# EAGLE board ACE (EAGLE 9.6.2)
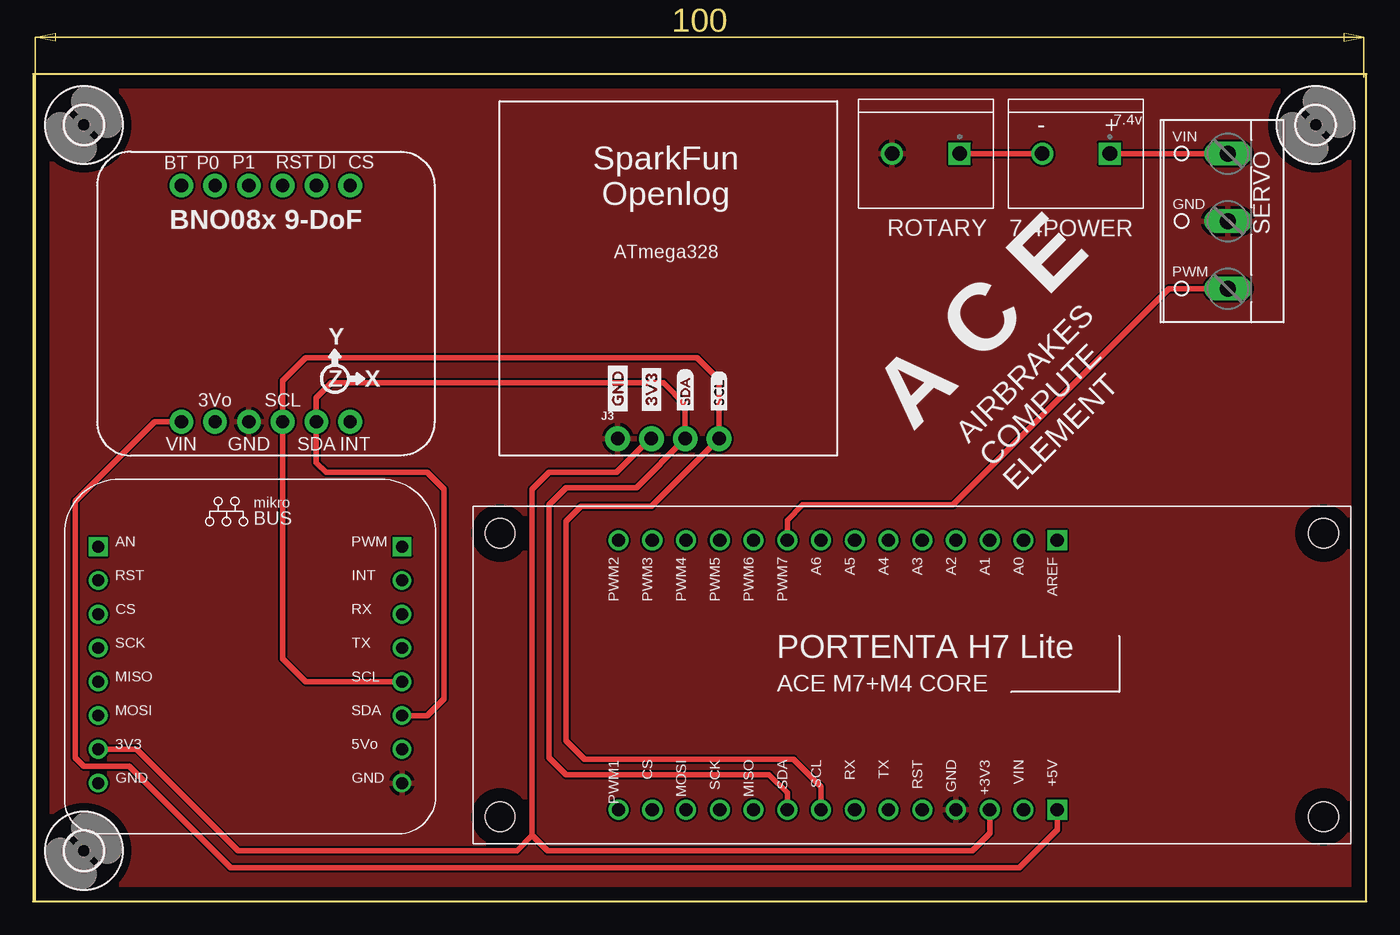
[diagram p0: board, top side]
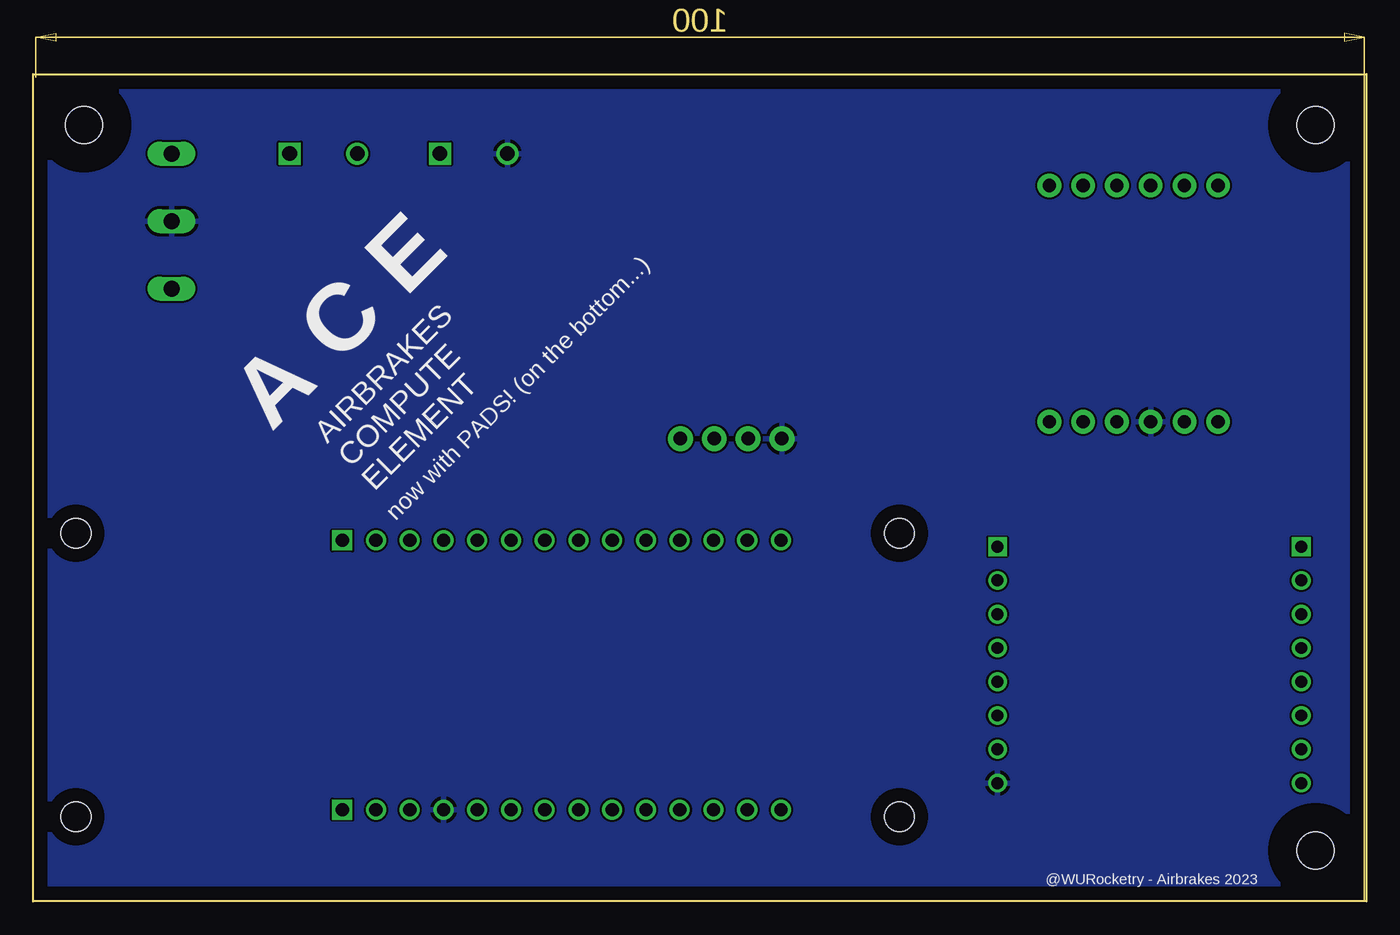
[diagram p1: board, bottom side, seen from below]

Size 100.33 x 62.23 mm. Coordinates in mm from the lower left corner, seen from the top.
Outline: 0,62.23 0,0 100.33,0 100.33,62.23 0,62.23
Copper layers (1*16): Top 0.035mm / dielectric 1.5mm / Bottom 0.035mm
Design rules "default *": minimum track width 6mil, minimum drill 0.35mm, track to track 6mil, track to pad 6mil, pad to pad 6mil, via to via 6mil, smd to smd 6mil, copper to edge 40mil, drill to drill 8mil, minimum pad ring 10mil, minimum via ring 8mil, stop-mask expansion 4mil, vias tented up to drill 0mil, thermal gap 10mil
Net classes: 1 vcc: width 0.152 mm; 2 lowpower: width 0.254 mm, drill 0.381 mm

## Footprints (pad centres in the part's own frame; a part is rotated, then mirrored left to right if it is on the bottom)
TE_282837-2 = drill 1.1 square: 1 -2.54,0 | drill 1.1: 2 2.54,0
1X04_NO_SILK = drill 1.016 pad 1.88: 1 0,0; 2 2.54,0; 3 5.08,0; 4 7.62,0
W237-3E = drill 1.194 long: 1 -5.08,-0.635; 2 0,-0.635; 3 5.08,-0.635
MIKROE-ALTITUDE-6-CLICK-PINOUT = drill 0.9: 3V3 2.54,7.62; 5V 25.4,7.62; CS 2.54,17.78; GND_0 2.54,5.08; GND_1 25.4,5.08; INT 25.4,20.32; MISO 2.54,12.7; MOSI 2.54,10.16; RST 2.54,20.32; RX 25.4,17.78; SCK 2.54,15.24; SCL 25.4,12.7; SDA 25.4,10.16; TX 25.4,15.24 | drill 0.9 square: AN 2.54,22.86; PWM 25.4,22.86
ADAFRUIT_BNO08X_FOOTPRINT = drill 1 pad 1.778: 3VO 10.16,3.81; BT 7.62,21.59; CS 20.32,21.59; DI 17.78,21.59; GND 12.7,3.81; INT 20.32,3.81; P0 10.16,21.59; P1 12.7,21.59; RST 15.24,21.59; SCL 15.24,3.81; SDA 17.78,3.81; VIN 7.62,3.81
MODULE_ABX00042_HEADERS = drill 1 square: J1 -10.135,10.947; J15 10.135,10.947 | drill 1: J2 -10.135,8.407; J3 -10.135,5.867; J4 -10.135,3.327; J5 -10.135,0.787; J6 -10.135,-1.753; J7 -10.135,-4.293; J8 -10.135,-6.833; J9 -10.135,-9.373; J10 -10.135,-11.913; J11 -10.135,-14.453; J12 -10.135,-16.993; J13 -10.135,-19.533; J14 -10.135,-22.073; J16 10.135,8.407; J17 10.135,5.867; J18 10.135,3.327; J19 10.135,0.787; J20 10.135,-1.753; J21 10.135,-4.293; J22 10.135,-6.833; J23 10.135,-9.373; J24 10.135,-11.913; J25 10.135,-14.453; J26 10.135,-16.993; J27 10.135,-19.533; J28 10.135,-22.073 | hole 2.25: -10.67,30.99; 10.67,30.99; 10.67,-30.99; -10.67,-30.99
2,8 = hole 2.8: 0,0

## Placement (x,y rotation side)
7.4POWER  282837-2  [TE_282837-2]  78.49,56.26 180 top
J3  PTH  [1X04_NO_SILK]  43.99,34.81 0 top
ROTARY_TERMINAL  282837-2  [TE_282837-2]  67.18,56.26 180 top
SERVO  [W237-3E]  89.28,51.18 90 top
U$1  MIKROE-ALTITUDE-6-CLICK-DVC  [MIKROE-ALTITUDE-6-CLICK-PINOUT]  2.35,3.82 0 top
U$5  ADAFRUIT_BNO08X  [ADAFRUIT_BNO08X_FOOTPRINT]  3.53,32.27 0 top
U$8  [3V3-03]  46.53,36.46 90 top
U$9  [GND-03]  43.99,36.46 90 top
U$10  ABX00042_HEADERS_IO  [MODULE_ABX00042_HEADERS]  66.12,17.03 270 top
U$13  [2,8]  3.81,58.42 0 top
U$14  [2,8]  96.52,58.42 0 top
U$15  [2,8]  3.81,3.81 0 top
U$16  [SDA1]  49.07,36.59 90 top
U$19  [SCL2]  51.61,36.59 90 top

## Library data of the parts
7.4POWER ROTARY_TERMINAL = 282837-2; AVAILABILITY: In Stock; CHECK_PRICES: https://www.snapeda.com/parts/282837-2/TE+Connectivity+AMP+Connectors/view-part/?ref=eda; COMMENT: 282837-2; DESCRIPTION: Terminal Block Connector Wire Receptacle 2 5.08 mm 30-16 AWG Green 13.5 A 250 V | TE Connectivity 282837-2; MF: TE Connectivity; MP: 282837-2; PACKAGE: None; PRICE: None; PURCHASE-URL: https://www.snapeda.com/api/url_track_click_mouser/?unipart_id=2549980&manufacturer=TE Connectivity&part_name=282837-2&search_term=None; SNAPEDA_LINK: https://www.snapeda.com/parts/282837-2/TE+Connectivity+AMP+Connectors/view-part/?ref=snap
J3 = SparkX
SERVO = con-wago-508; OC_FARNELL: unknown; OC_NEWARK: unknown
U$1 = MIKROE-4903
U$5 = ADAFRUIT_BNO08x
U$8 U$9 = Labels
U$10 = ABX00042
U$13-U$15 = holes
U$16 U$19 = buzzard_labels (13)

## Nets
3.3V [lowpower]: J3.2 U$1.3V3 U$10.J17
GND [lowpower]: J3.1 ROTARY_TERMINAL.2 SERVO.2 U$1.GND_1 U$5.GND U$10.J18
N$4 [lowpower]: U$1.GND_0
SCL: J3.4 U$1.SCL U$5.SCL U$10.J22
SDA: J3.3 U$1.SDA U$5.SDA U$10.J23
SERVO_GND: 7.4POWER.2 ROTARY_TERMINAL.1
SERVO_PWM: SERVO.1 U$10.J9
SERVO_VIN: 7.4POWER.1 SERVO.3
VCC [lowpower]: U$5.VIN U$10.J15

## Tracks (layer width: path | path; a pad name or v marks a point on that pad's centre or on a via)
3.3V
  Top 0.406: U$10.J17 71.99,5.12 70.7,3.82 38.69,3.82 37.55,4.97 | J3.2 46.44,34.81 43.9,32.27 38.82,32.27 37.55,31 37.55,4.97 | 37.55,4.97 36.41,3.82 15.42,3.82 7.8,11.44 U$1.3V3
GND
  pour Bottom: 0,62.23 100.33,62.23 100.33,0 0,0
  pour Top: 100.33,62.23 0,62.23 0,0 100.33,0
SCL
  Top 0.406: U$10.J22 59.29,8.62 57.23,10.68 41.49,10.68 40.09,12.08 40.09,28.59 41.23,29.73 46.53,29.73 J3.4 51.61,39.26 49.96,40.91 20.52,40.91 18.77,39.16 U$5.SCL 18.77,18.25 20.5,16.52 U$1.SCL
SDA
  Top 0.406: U$10.J23 56.75,8.17 55.38,9.54 40.09,9.54 38.82,10.81 38.82,29.86 40.09,31.13 45.39,31.13 J3.3 49.07,37.35 47.42,39 22.42,39 21.31,37.89 U$5.SDA 21.31,33 22.04,32.27 29.64,32.27 30.91,31 30.91,15.25 29.64,13.98 U$1.SDA
SERVO_GND
  Top 0.406: 7.4POWER.2 ROTARY_TERMINAL.1
SERVO_PWM
  Top 0.406: U$10.J9 56.75,28.68 57.91,29.84 69.22,29.84 85.47,46.1 SERVO.1
SERVO_VIN
  Top 0.406: 7.4POWER.1 SERVO.3
VCC
  Top 0.406: U$10.J15 77.07,5.37 74.24,2.54 14.86,2.54 7.24,10.16 3.81,10.16 3.18,10.8 3.18,30.1 9.16,36.08 U$5.VIN

## Text on the board
tPlace: - | + | 7.4v | VIN | SparkFun / Openlog | GND | ROTARY | ATmega328 | PWM | A C E | AIRBRAKES / COMPUTE / ELEMENT
bPlace: A C E | AIRBRAKES / COMPUTE / ELEMENT | now with PADS! (on the bottom...) | @WURocketry - Airbrakes 2023